# Altium PCB PCB.PcbDoc (part 2 of 3)
Units mm, origin at the board's own origin, x right, y up, seen from the top; angles counter-clockwise.
Board outline 60.66 x 261 mm, 2 copper layers (Top Layer, Bottom Layer); 258 components, 193 nets, 900 pads, 4 vias.
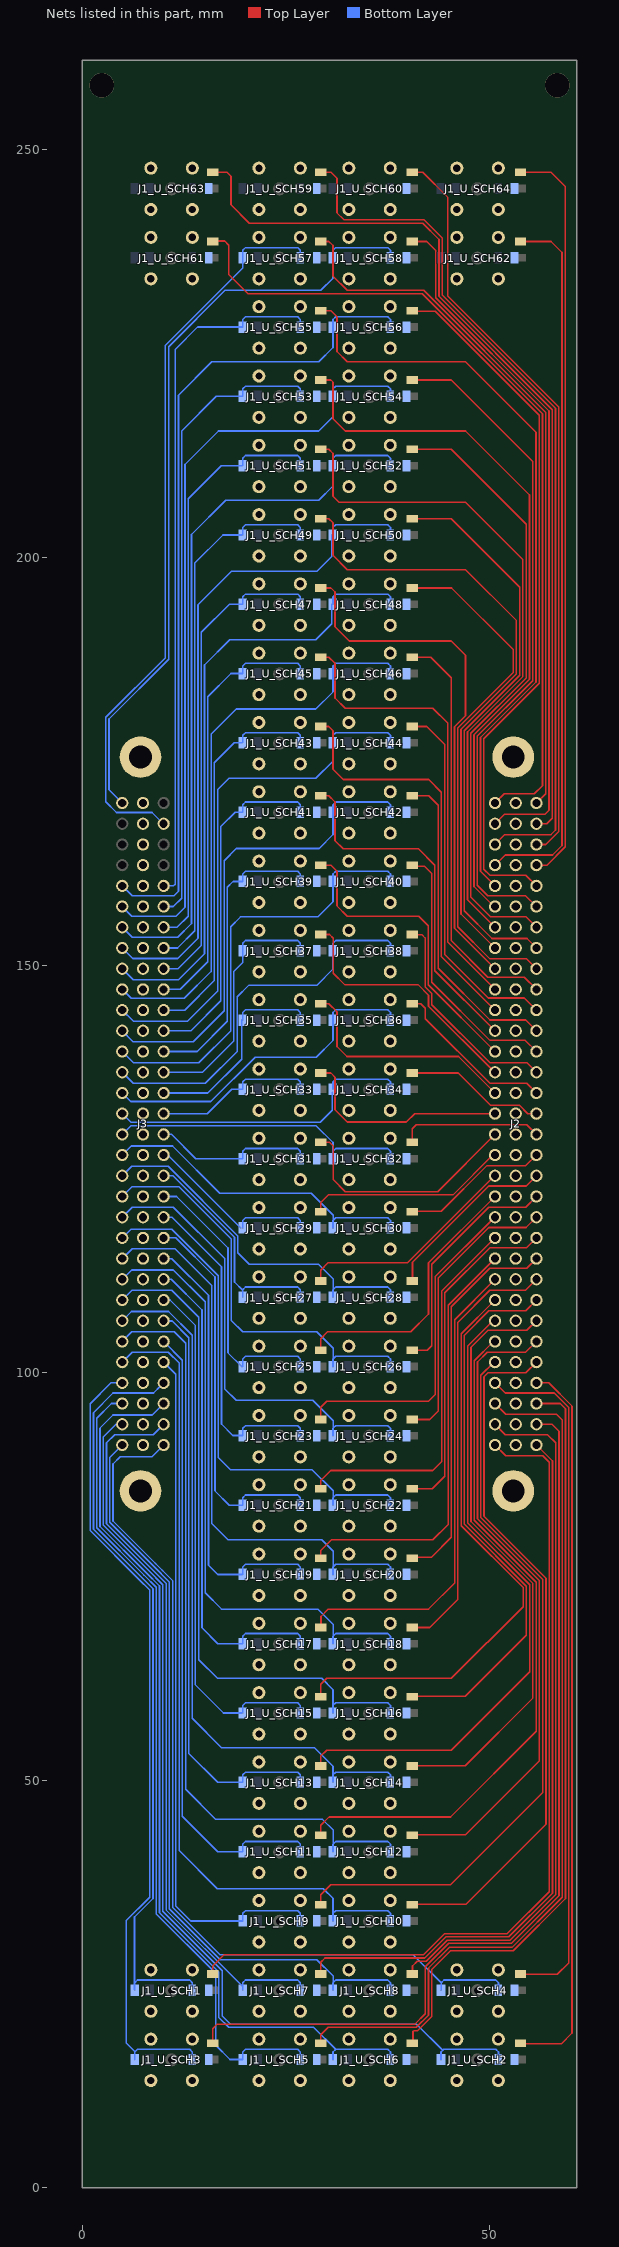
[diagram p2: the nets of this part, all layers, seen from the top]

## Part data
C1_U_SCH1 C1_U_SCH2 C1_U_SCH3 C1_U_SCH4 C1_U_SCH5 C1_U_SCH6 C1_U_SCH7 C1_U_SCH8 C1_U_SCH9 C1_U_SCH10 C1_U_SCH11 C1_U_SCH12 C1_U_SCH13 C1_U_SCH14 C1_U_SCH15 C1_U_SCH16 C1_U_SCH17 C1_U_SCH18 C1_U_SCH19 C1_U_SCH20 C1_U_SCH21 C1_U_SCH22 C1_U_SCH23 C1_U_SCH24 C1_U_SCH25 C1_U_SCH26 C1_U_SCH27 C1_U_SCH28 C1_U_SCH29 C1_U_SCH30 C1_U_SCH31 C1_U_SCH32 C1_U_SCH33 C1_U_SCH34 C1_U_SCH35 C1_U_SCH36 C1_U_SCH37 C1_U_SCH38 C1_U_SCH39 C1_U_SCH40 C1_U_SCH41 C1_U_SCH42 C1_U_SCH43 C1_U_SCH44 C1_U_SCH45 C1_U_SCH46 C1_U_SCH47 C1_U_SCH48 C1_U_SCH49 C1_U_SCH50 C1_U_SCH51 C1_U_SCH52 C1_U_SCH53 C1_U_SCH54 C1_U_SCH55 C1_U_SCH56 C1_U_SCH57 C1_U_SCH58 C1_U_SCH59 C1_U_SCH60 C1_U_SCH61 C1_U_SCH62 C1_U_SCH63 C1_U_SCH64: library part CC0805_10NF_50V_10%_X7R, "Non-polarised capacitor", Case=0805, Manufacturer=GENERIC, Manufacturer1 ComponentHeight=0.88mm, Manufacturer1 Example=KEMET, Manufacturer1 Part Number=C0805C103K5RACTU, Tolerance=±10%, Voltage=50V, Author="CERN DEM JLC", Component Type=Standard, CreateDate=03.12.2007, HelpURL=\\cern.ch\dfs\Applications\Altium\Datasheets\CC0805_X7R_KEMET.pdf, LatestRevisionDate=22.04.2015, Manufacturer Part Number=CC0805_10NF_50V_10%_X7R, Mounted=Yes, Part Description="SMD Multilayer Chip Ceramic Capacitor", Part Number=CC0805_10NF_50V_10%_X7R, Pin Count=2, Sense=No, SMD=Yes, Socket=No, Status=Preferred, TC=X7R
J1_U_SCH1 J1_U_SCH2 J1_U_SCH3 J1_U_SCH4 J1_U_SCH5 J1_U_SCH6 J1_U_SCH7 J1_U_SCH8 J1_U_SCH9 J1_U_SCH10 J1_U_SCH11 J1_U_SCH12 J1_U_SCH13 J1_U_SCH14 J1_U_SCH15 J1_U_SCH16 J1_U_SCH17 J1_U_SCH18 J1_U_SCH19 J1_U_SCH20 J1_U_SCH21 J1_U_SCH22 J1_U_SCH23 J1_U_SCH24 J1_U_SCH25 J1_U_SCH26 J1_U_SCH27 J1_U_SCH28 J1_U_SCH29 J1_U_SCH30 J1_U_SCH31 J1_U_SCH32 J1_U_SCH33 J1_U_SCH34 J1_U_SCH35 J1_U_SCH36 J1_U_SCH37 J1_U_SCH38 J1_U_SCH39 J1_U_SCH40 J1_U_SCH41 J1_U_SCH42 J1_U_SCH43 J1_U_SCH44 J1_U_SCH45 J1_U_SCH46 J1_U_SCH47 J1_U_SCH48 J1_U_SCH49 J1_U_SCH50 J1_U_SCH51 J1_U_SCH52 J1_U_SCH53 J1_U_SCH54 J1_U_SCH55 J1_U_SCH56 J1_U_SCH57 J1_U_SCH58 J1_U_SCH59 J1_U_SCH60 J1_U_SCH61 J1_U_SCH62 J1_U_SCH63 J1_U_SCH64: library part LEMO_EPA.00.250.NTN, Manufacturer=LEMO, Manufacturer Part Number=EPA.00.250.NTN, Author="CERN DEM JLC", ComponentHeight=14mm, Component Type=Standard, CreateDate=22.04.2008, Family="LEMO 00", HelpURL=\\cern.ch\dfs\Applications\Altium\Datasheets\LEMO_EPA.00.250.NTN.pdf, LatestRevisionDate=22.04.2008, Mounted=Yes, Part Description="Size 00, 50 Ohms Coaxial Straight socket", Part Number=LEMO_EPA.00.250.NTN, Pin Count=2, PressFit=No, SCEM=09.46.11.184.2, Sense=No, SMD=No, Socket=No, Status=None
J2 J3: library part "HARTING_09 03 296 6861", "Connector 96abc Female (3x32)", Manufacturer=HARTING, Manufacturer Part Number="09 03 296 6861", Author="CERN DEM JLC", ComponentHeight=11.6mm, Component Type=Standard, CreateDate=19.12.2016, Family="DIN 41612 Type C", HelpURL="\\cern.ch\dfs\Applications\Altium\Datasheets\HARTING_09 03 296 6861.pdf", LatestRevisionDate=19.12.2016, Mounted=Yes, Part Description="DIN 41612, Type C, 96 Position, Rows a+b+c, Performance level 2, Press-in Lead Lead 13mm, Pitch 2.54mm, Straight Female Connector", Part Number="HARTING_09 03 296 6861", Pin Count=98, PressFit=Yes, Sense=No, SMD=No, Socket=No, Status=None
R1_U_SCH1 R1_U_SCH2 R1_U_SCH3 R1_U_SCH4 R1_U_SCH5 R1_U_SCH6 R1_U_SCH7 R1_U_SCH8 R1_U_SCH9 R1_U_SCH10 R1_U_SCH11 R1_U_SCH12 R1_U_SCH13 R1_U_SCH14 R1_U_SCH15 R1_U_SCH16 R1_U_SCH17 R1_U_SCH18 R1_U_SCH19 R1_U_SCH20 R1_U_SCH21 R1_U_SCH22 R1_U_SCH23 R1_U_SCH24 R1_U_SCH25 R1_U_SCH26 R1_U_SCH27 R1_U_SCH28 R1_U_SCH29 R1_U_SCH30 R1_U_SCH31 R1_U_SCH32 R1_U_SCH33 R1_U_SCH34 R1_U_SCH35 R1_U_SCH36 R1_U_SCH37 R1_U_SCH38 R1_U_SCH39 R1_U_SCH40 R1_U_SCH41 R1_U_SCH42 R1_U_SCH43 R1_U_SCH44 R1_U_SCH45 R1_U_SCH46 R1_U_SCH47 R1_U_SCH48 R1_U_SCH49 R1_U_SCH50 R1_U_SCH51 R1_U_SCH52 R1_U_SCH53 R1_U_SCH54 R1_U_SCH55 R1_U_SCH56 R1_U_SCH57 R1_U_SCH58 R1_U_SCH59 R1_U_SCH60 R1_U_SCH61 R1_U_SCH62 R1_U_SCH63 R1_U_SCH64: library part R0805_300R_1%_0.125W_100PPM, "Resistor - 1%", Case=0805, Manufacturer=GENERIC, Manufacturer1 ComponentHeight=0.6mm, Manufacturer1 Example="NIC COMPONENT", Manufacturer1 Part Number=NRC10F3000TRF, Power=0.125W, Tolerance=±1%, Author="CERN DEM JLC", Component Type=Standard, CreateDate=03.12.2007, HelpURL=\\cern.ch\dfs\Applications\Altium\Datasheets\R0805_NIC_NRC.pdf, LatestRevisionDate=13.03.2008, Manufacturer Part Number=R0805_300R_1%_0.125W_100PPM, Mounted=Yes, Part Description="General Purpose Thick Film Chip Resistor", Part Number=R0805_300R_1%_0.125W_100PPM, Pin Count=2, PressFit=No, Sense=No, SMD=Yes, Socket=No, Status=Preferred, TC=±100ppm/°C
R2_U_SCH1 R2_U_SCH2 R2_U_SCH3 R2_U_SCH4 R2_U_SCH5 R2_U_SCH6 R2_U_SCH7 R2_U_SCH8 R2_U_SCH9 R2_U_SCH10 R2_U_SCH11 R2_U_SCH12 R2_U_SCH13 R2_U_SCH14 R2_U_SCH15 R2_U_SCH16 R2_U_SCH17 R2_U_SCH18 R2_U_SCH19 R2_U_SCH20 R2_U_SCH21 R2_U_SCH22 R2_U_SCH23 R2_U_SCH24 R2_U_SCH25 R2_U_SCH26 R2_U_SCH27 R2_U_SCH28 R2_U_SCH29 R2_U_SCH30 R2_U_SCH31 R2_U_SCH32 R2_U_SCH33 R2_U_SCH34 R2_U_SCH35 R2_U_SCH36 R2_U_SCH37 R2_U_SCH38 R2_U_SCH39 R2_U_SCH40 R2_U_SCH41 R2_U_SCH42 R2_U_SCH43 R2_U_SCH44 R2_U_SCH45 R2_U_SCH46 R2_U_SCH47 R2_U_SCH48 R2_U_SCH49 R2_U_SCH50 R2_U_SCH51 R2_U_SCH52 R2_U_SCH53 R2_U_SCH54 R2_U_SCH55 R2_U_SCH56 R2_U_SCH57 R2_U_SCH58 R2_U_SCH59 R2_U_SCH60 R2_U_SCH61 R2_U_SCH62 R2_U_SCH63 R2_U_SCH64: library part R0805_51R_1%_0.125W_100PPM, "Resistor - 1%", Case=0805, Manufacturer=GENERIC, Manufacturer1 ComponentHeight=0.6mm, Manufacturer1 Example="NIC COMPONENT", Manufacturer1 Part Number=NRC10F51R0TRF, Power=0.125W, Tolerance=±1%, Author="CERN DEM JLC", Component Type=Standard, CreateDate=03.12.2007, HelpURL=\\cern.ch\dfs\Applications\Altium\Datasheets\R0805_NIC_NRC.pdf, LatestRevisionDate=13.03.2008, Manufacturer Part Number=R0805_51R_1%_0.125W_100PPM, Mounted=Yes, Part Description="General Purpose Thick Film Chip Resistor", Part Number=R0805_51R_1%_0.125W_100PPM, Pin Count=2, PressFit=No, Sense=No, SMD=Yes, Socket=No, Status=Preferred, TC=±100ppm/°C

## Via types
v1: diameter 3, hole 3, Top Layer to Bottom Layer, 4 vias

## Nets (pads, with @x,y where several pads share a name; then routed paths per layer and width w, separated by ;. In a path a pad name is that pad's centre, name@x,y a point inside that pad or via, vN(x,y) a via of type N, cw(c..) or ccw(c..) an arc to the next point about the centre after c; other vN are vias at no path point)
GND: J1_U_SCH1.2 J1_U_SCH2.2 J1_U_SCH3.2 J1_U_SCH4.2 J1_U_SCH5.2 J1_U_SCH6.2 J1_U_SCH7.2 J1_U_SCH8.2 J1_U_SCH9.2 J1_U_SCH10.2 J1_U_SCH11.2 J1_U_SCH12.2 J1_U_SCH13.2 J1_U_SCH14.2 J1_U_SCH15.2 J1_U_SCH16.2 J1_U_SCH17.2 J1_U_SCH18.2 J1_U_SCH19.2 J1_U_SCH20.2 J1_U_SCH21.2 J1_U_SCH22.2 J1_U_SCH23.2 J1_U_SCH24.2 J1_U_SCH25.2 J1_U_SCH26.2 J1_U_SCH27.2 J1_U_SCH28.2 J1_U_SCH29.2 J1_U_SCH30.2 J1_U_SCH31.2 J1_U_SCH32.2 J1_U_SCH33.2 J1_U_SCH34.2 J1_U_SCH35.2 J1_U_SCH36.2 J1_U_SCH37.2 J1_U_SCH38.2 J1_U_SCH39.2 J1_U_SCH40.2 J1_U_SCH41.2 J1_U_SCH42.2 J1_U_SCH43.2 J1_U_SCH44.2 J1_U_SCH45.2 J1_U_SCH46.2 J1_U_SCH47.2 J1_U_SCH48.2 J1_U_SCH49.2 J1_U_SCH50.2 J1_U_SCH51.2 J1_U_SCH52.2 J1_U_SCH53.2 J1_U_SCH54.2 J1_U_SCH55.2 J1_U_SCH56.2 J1_U_SCH57.2 J1_U_SCH58.2 J1_U_SCH59.2 J1_U_SCH60.2 J1_U_SCH61.2 J1_U_SCH62.2 J1_U_SCH63.2 J1_U_SCH64.2 J2.b1 J2.b2 J2.b3 J2.b4 J2.b5 J2.b6 J2.b7 J2.b8 J2.b9 J2.b10 J2.b11 J2.b12 J2.b13 J2.b14 J2.b15 J2.b16 J2.b17 J2.b18 J2.b19 J2.b20 J2.b21 J2.b22 J2.b23 J2.b24 J2.b25 J2.b26 J2.b27 J2.b28 J2.b29 J2.b30 J2.b31 J2.b32 J2.MTG1 J2.MTG2 J3.b1 J3.b2 J3.b3 J3.b4 J3.b5 J3.b6 J3.b7 J3.b8 J3.b9 J3.b10 J3.b11 J3.b12 J3.b13 J3.b14 J3.b15 J3.b16 J3.b17 J3.b18 J3.b19 J3.b20 J3.b21 J3.b22 J3.b23 J3.b24 J3.b25 J3.b26 J3.b27 J3.b28 J3.b29 J3.b30 J3.b31 J3.b32 J3.MTG1 J3.MTG2 R2_U_SCH1.1 R2_U_SCH2.1 R2_U_SCH3.1 R2_U_SCH4.1 R2_U_SCH5.1 R2_U_SCH6.1 R2_U_SCH7.1 R2_U_SCH8.1 R2_U_SCH9.1 R2_U_SCH10.1 R2_U_SCH11.1 R2_U_SCH12.1 R2_U_SCH13.1 R2_U_SCH14.1 R2_U_SCH15.1 R2_U_SCH16.1 R2_U_SCH17.1 R2_U_SCH18.1 R2_U_SCH19.1 R2_U_SCH20.1 R2_U_SCH21.1 R2_U_SCH22.1 R2_U_SCH23.1 R2_U_SCH24.1 R2_U_SCH25.1 R2_U_SCH26.1 R2_U_SCH27.1 R2_U_SCH28.1 R2_U_SCH29.1 R2_U_SCH30.1 R2_U_SCH31.1 R2_U_SCH32.1 R2_U_SCH33.1 R2_U_SCH34.1 R2_U_SCH35.1 R2_U_SCH36.1 R2_U_SCH37.1 R2_U_SCH38.1 R2_U_SCH39.1 R2_U_SCH40.1 R2_U_SCH41.1 R2_U_SCH42.1 R2_U_SCH43.1 R2_U_SCH44.1 R2_U_SCH45.1 R2_U_SCH46.1 R2_U_SCH47.1 R2_U_SCH48.1 R2_U_SCH49.1 R2_U_SCH50.1 R2_U_SCH51.1 R2_U_SCH52.1 R2_U_SCH53.1 R2_U_SCH54.1 R2_U_SCH55.1 R2_U_SCH56.1 R2_U_SCH57.1 R2_U_SCH58.1 R2_U_SCH59.1 R2_U_SCH60.1 R2_U_SCH61.1 R2_U_SCH62.1 R2_U_SCH63.1 R2_U_SCH64.1
  other v1: 2.39,257.9 58.27,257.9
HV_OFFSET1: J2.a1 R1_U_SCH1.2 | length 106.1
  Top Layer w0.2: R1_U_SCH1.2@16.025,26.35 16.025,27.225 17.4,28.6 41.872,28.6 44.47,31.199 52.17,31.199 57.3,36.328 57.3,88.994 56.494,89.8 51.98,89.8 J2.a1@50.65,91.13
HV_OFFSET2: J2.c4 R1_U_SCH2.2 | length 89.3
  Top Layer w0.2: R1_U_SCH2.2@53.775,17.7 58.8,17.7 60.1,19 60.1,95.9 57.25,98.75 J2.c4@55.73,98.75
HV_OFFSET3: J2.c2 R1_U_SCH3.2 | length 114.5
  Top Layer w0.2: R1_U_SCH3.2@16.025,17.75 16.025,19.525 16.6,20.1 40.834,20.1 42.1,21.366 42.1,27.131 44.967,29.999 52.667,29.999 58.5,35.831 58.5,92.8 57.63,93.67 J2.c2@55.73,93.67
HV_OFFSET4: J2.a4 R1_U_SCH4.2 | length 84.9
  Top Layer w0.2: J2.a4@50.65,98.75 51.9,97.5 57.934,97.5 59.7,95.734 59.7,27.6 58.3,26.2 R1_U_SCH4.2@53.825,26.2
HV_OFFSET5: J2.a3 R1_U_SCH5.2 | length 108.6
  Top Layer w0.2: R1_U_SCH5.2@29.275,17.75 29.275,18.775 30.2,19.7 41,19.7 42.5,21.2 42.5,26.966 45.034,29.5 52.734,29.5 58.9,35.666 58.9,94.2 58.2,94.9 51.96,94.9 J2.a3@50.65,96.21
HV_OFFSET6: J2.c3 R1_U_SCH6.2 | length 94.2
  Top Layer w0.2: R1_U_SCH6.2@40.525,17.75 40.6,17.825 40.6,19.183 40.717,19.3 41.166,19.3 42.9,21.034 42.9,26.8 45.2,29.1 52.9,29.1 59.3,35.5 59.3,95.569 58.659,96.21 J2.c3@55.73,96.21
HV_OFFSET7: J2.c1 R1_U_SCH7.2 | length 89
  Top Layer w0.2: R1_U_SCH7.2@29.275,26.35 29.275,27.675 29.8,28.2 42.037,28.2 44.636,30.799 52.336,30.799 57.7,36.163 57.7,89.16 J2.c1@55.73,91.13
HV_OFFSET8: J2.a2 R1_U_SCH8.2 | length 86
  Top Layer w0.2: R1_U_SCH8.2@40.525,26.25 40.525,27.225 41.1,27.8 42.203,27.8 44.801,30.399 52.501,30.399 58.1,35.997 58.1,91.4 57.1,92.4 51.92,92.4 J2.a2@50.65,93.67
HV_OFFSET9: J2.a5 R1_U_SCH9.2 | length 90.3
  Top Layer w0.2: R1_U_SCH9.2@29.275,34.85 29.275,35.975 30.5,37.2 45.2,37.2 56.5,48.5 56.5,63.8 56.5,74.634 48.9,82.234 48.9,99.666 50.524,101.29 J2.a5@50.65,101.29
HV_OFFSET10: J2.c5 R1_U_SCH10.2 | length 85.7
  Top Layer w0.2: R1_U_SCH10.2@40.525,34.8 47.1,34.8 56.9,44.6 56.9,74.8 49.3,82.4 49.3,99.5 49.8,100 54.44,100 J2.c5@55.73,101.29
HV_OFFSET11: J2.a6 R1_U_SCH11.2 | length 84.5
  Top Layer w0.2: R1_U_SCH11.2@29.275,43.35 29.275,44.475 30.3,45.5 45.2,45.5 55.7,56 55.7,67.116 55.7,74.303 48.1,81.903 48.1,101.466 50.464,103.83 J2.a6@50.65,103.83
HV_OFFSET12: J2.c6 R1_U_SCH12.2 | length 79.7
  Top Layer w0.2: R1_U_SCH12.2@40.525,43.3 47,43.3 56.1,52.4 56.1,66.95 56.1,74.469 48.5,82.069 48.5,101.3 49.7,102.5 54.4,102.5 J2.c6@55.73,103.83
HV_OFFSET13: J2.a7 R1_U_SCH13.2 | length 78.9
  Top Layer w0.2: R1_U_SCH13.2@29.275,51.75 29.275,52.975 30,53.7 45.3,53.7 54.9,63.3 54.9,69.5 54.9,73.972 47.3,81.572 47.3,103.266 50.404,106.37 J2.a7@50.65,106.37
HV_OFFSET14: J2.c7 R1_U_SCH14.2 | length 73.7
  Top Layer w0.2: R1_U_SCH14.2@40.525,51.8 47,51.8 55.3,60.1 55.3,67.6 ; 55.3,67.6 55.3,74.137 47.7,81.737 47.7,103.1 49.8,105.2 54.56,105.2 J2.c7@55.73,106.37
HV_OFFSET15: J2.a8 R1_U_SCH15.2 | length 72.8
  Top Layer w0.2: R1_U_SCH15.2@29.275,60.25 29.275,61.775 30,62.5 45.3,62.5 54.1,71.3 54.1,73.64 46.5,81.24 46.5,104.766 50.644,108.91 J2.a8@50.65,108.91
HV_OFFSET16: J2.c8 R1_U_SCH16.2 | length 67.6
  Top Layer w0.2: R1_U_SCH16.2@40.525,60.3 47,60.3 54.5,67.8 54.5,69.75 54.5,73.806 46.9,81.406 46.9,104.6 49.9,107.6 54.42,107.6 J2.c8@55.73,108.91
HV_OFFSET17: J2.a9 R1_U_SCH17.2 | length 58.8
  Top Layer w0.2: R1_U_SCH17.2@29.275,68.75 29.3,68.775 29.3,70.1 30.2,71 42.5,71 45.7,74.2 45.7,106.5 J2.a9@50.65,111.45
HV_OFFSET18: J2.c9 R1_U_SCH18.2 | length 52.8
  Top Layer w0.2: R1_U_SCH18.2@40.525,68.75 42.65,68.75 46.1,72.2 46.1,106.2 50,110.1 54.38,110.1 J2.c9@55.73,111.45
HV_OFFSET19: J2.a10 R1_U_SCH19.2 | length 52.8
  Top Layer w0.2: R1_U_SCH19.2@29.275,77.35 29.275,78.175 30.6,79.5 43.025,79.5 44.9,81.375 44.9,108.266 50.624,113.99 J2.a10@50.65,113.99
HV_OFFSET20: J2.c10 R1_U_SCH20.2 | length 47
  Top Layer w0.2: R1_U_SCH20.2@40.525,77.35 42.85,77.35 45.3,79.8 45.3,108.1 50,112.8 54.54,112.8 J2.c10@55.73,113.99
HV_OFFSET21: J2.a11 R1_U_SCH21.2 | length 46.9
  Top Layer w0.2: R1_U_SCH21.2@29.275,85.85 29.275,86.775 30.5,88 43.025,88 44.1,89.075 44.1,109.98 J2.a11@50.65,116.53
HV_OFFSET22: J2.c11 R1_U_SCH22.2 | length 41.1
  Top Layer w0.2: R1_U_SCH22.2@40.525,85.75 42.95,85.75 44.5,87.3 44.5,109.8 50,115.3 54.5,115.3 J2.c11@55.73,116.53
HV_OFFSET23: J2.a12 R1_U_SCH23.2 | length 40.9
  Top Layer w0.2: R1_U_SCH23.2@29.275,94.35 29.275,95.775 30,96.5 42.5,96.5 43.3,97.3 43.3,111.766 50.604,119.07 J2.a12@50.65,119.07
HV_OFFSET24: J2.c12 R1_U_SCH24.2 | length 35
  Top Layer w0.2: R1_U_SCH24.2@40.525,94.25 42.65,94.25 43.7,95.3 43.7,111.6 49.9,117.8 54.46,117.8 J2.c12@55.73,119.07
HV_OFFSET25: J2.a13 R1_U_SCH25.2 | length 33.6
  Top Layer w0.2: R1_U_SCH25.2@29.275,102.85 29.275,104.175 30.1,105 40.3,105 42.5,107.2 42.5,113.466 50.644,121.61 J2.a13@50.65,121.61
HV_OFFSET26: J2.c13 R1_U_SCH26.2 | length 28.9
  Top Layer w0.2: R1_U_SCH26.2@40.525,102.75 42.35,102.75 42.9,103.3 42.9,113.3 49.9,120.3 54.42,120.3 J2.c13@55.73,121.61
HV_OFFSET27: J2.a14 R1_U_SCH27.2 | length 27.4
  Top Layer w0.2: R1_U_SCH27.2@29.275,111.35 29.275,112.575 30.2,113.5 39.934,113.5 50.584,124.15 J2.a14@50.65,124.15
HV_OFFSET28: J2.c14 R1_U_SCH28.2 | length 21.9
  Top Layer w0.2: R1_U_SCH28.2@40.525,111.25 40.525,113.525 49.9,122.9 54.48,122.9 J2.c14@55.73,124.15
HV_OFFSET29: J2.a15 R1_U_SCH29.2 | length 24.8
  Top Layer w0.2: R1_U_SCH29.2@29.275,119.85 29.275,120.875 30.2,121.8 45.5,121.8 50.39,126.69 J2.a15@50.65,126.69
HV_OFFSET30: J2.c15 R1_U_SCH30.2 | length 18
  Top Layer w0.2: R1_U_SCH30.2@40.575,119.8 44.066,119.8 49.666,125.4 54.44,125.4 J2.c15@55.73,126.69
HV_OFFSET31: J2.a16 R1_U_SCH31.2 | length 29.2
  Top Layer w0.2: R1_U_SCH31.2@29.275,128.25 30.35,128.25 30.8,127.8 30.8,123.7 32.3,122.2 43.62,122.2 J2.a16@50.65,129.23
HV_OFFSET32: J2.c16 R1_U_SCH32.2 | length 17.6
  Top Layer w0.2: R1_U_SCH32.2@40.525,128.25 40.5,128.275 40.5,129.9 41,130.4 54.56,130.4 J2.c16@55.73,129.23
HV_OFFSET33: J2.a17 R1_U_SCH33.2 | length 26.6
  Top Layer w0.2: R1_U_SCH33.2@29.275,136.75 30.525,136.75 31.025,136.25 31.025,132.25 32.525,130.75 39.775,130.75 40.795,131.77 J2.a17@50.65,131.77
HV_OFFSET34: J2.c17 R1_U_SCH34.2 | length 17.3
  Top Layer w0.2: R1_U_SCH34.2@40.525,136.75 46.15,136.75 50.08,132.82 53.625,132.82 54.675,131.77 J2.c17@55.73,131.77
HV_OFFSET35: J2.a18 R1_U_SCH35.2 | length 28.4
  Top Layer w0.2: R1_U_SCH35.2@29.275,145.25 30.275,145.25 31.275,144.25 31.275,140 32.495,138.78 46.18,138.78 J2.a18@50.65,134.31
HV_OFFSET36: J2.c18 R1_U_SCH36.2 | length 20.5
  Top Layer w0.2: R1_U_SCH36.2@40.525,145.25 41.55,145.25 42.1,144.7 42.1,143.426 50.026,135.5 54.54,135.5 J2.c18@55.73,134.31
HV_OFFSET37: J2.a19 R1_U_SCH37.2 | length 31.7
  Top Layer w0.2: R1_U_SCH37.2@29.275,153.75 30.35,153.75 30.8,153.3 30.8,149 32.2,147.6 41.2,147.6 42.5,146.3 42.5,144.959 50.609,136.85 J2.a19@50.65,136.85
HV_OFFSET38: J2.c19 R1_U_SCH38.2 | length 26.5
  Top Layer w0.2: R1_U_SCH38.2@40.525,153.75 40.575,153.7 41.7,153.7 42.075,153.325 42.075,147.325 42.9,146.5 42.9,145.125 50.025,138 54.58,138 J2.c19@55.73,136.85
HV_OFFSET39: J2.a20 R1_U_SCH39.2 | length 37.6
  Top Layer w0.2: R1_U_SCH39.2@29.275,162.25 30.525,162.25 31.275,161.5 31.275,157.25 32.525,156 41.3,156 42.475,154.825 42.475,147.565 J2.a20@50.65,139.39
HV_OFFSET40: J2.c20 R1_U_SCH40.2 | length 32.5
  Top Layer w0.2: R1_U_SCH40.2@40.525,162.25 40.675,162.1 42,162.1 42.875,161.225 42.875,147.9 50.025,140.75 54.37,140.75 J2.c20@55.73,139.39
HV_OFFSET41: J2.a21 R1_U_SCH41.2 | length 43.7
  Top Layer w0.2: R1_U_SCH41.2@29.275,170.75 30.275,170.75 31.025,170 31.025,165.25 32.025,164.25 41.275,164.25 43.275,162.25 43.275,149.305 J2.a21@50.65,141.93
HV_OFFSET42: J2.c21 R1_U_SCH42.2 | length 38.9
  Top Layer w0.2: R1_U_SCH42.2@40.525,170.75 42.525,170.75 43.675,169.6 43.675,149.6 50.025,143.25 54.41,143.25 J2.c21@55.73,141.93
HV_OFFSET43: J2.a22 R1_U_SCH43.2 | length 50.4
  Top Layer w0.2: R1_U_SCH43.2@29.275,179.25 30.275,179.25 30.775,178.75 30.775,174 32.025,172.75 42.525,172.75 44.075,171.2 44.075,151.045 J2.a22@50.65,144.47
HV_OFFSET44: J2.c22 R1_U_SCH44.2 | length 44.7
  Top Layer w0.2: R1_U_SCH44.2@40.525,179.25 42.275,179.25 44.475,177.05 44.475,151.3 49.815,145.96 54.24,145.96 J2.c22@55.73,144.47
HV_OFFSET45: J2.a23 R1_U_SCH45.2 | length 56.5
  Top Layer w0.2: R1_U_SCH45.2@29.275,187.75 30.275,187.75 31.025,187 31.025,182.75 32.275,181.5 43.025,181.5 44.875,179.65 44.875,152.785 J2.a23@50.65,147.01
HV_OFFSET46: J2.c23 R1_U_SCH46.2 | length 51
  Top Layer w0.2: R1_U_SCH46.2@40.525,187.75 42.775,187.75 45.275,185.25 45.275,153 49.775,148.5 54.24,148.5 J2.c23@55.73,147.01
HV_OFFSET47: J2.a24 R1_U_SCH47.2 | length 64.7
  Top Layer w0.2: R1_U_SCH47.2@29.275,196.25 30.525,196.25 31.025,195.75 31.025,191.5 32.775,189.75 45.275,189.75 47.025,188 47.025,180.591 45.675,179.241 45.675,154.525 J2.a24@50.65,149.55
HV_OFFSET48: J2.c24 R1_U_SCH48.2 | length 64.1
  Top Layer w0.2: R1_U_SCH48.2@40.525,196.25 45.325,196.25 52.875,188.7 52.875,185.875 46.075,179.075 46.075,154.7 50.025,150.75 54.53,150.75 J2.c24@55.73,149.55
HV_OFFSET49: J2.a25 R1_U_SCH49.2 | length 76.2
  Top Layer w0.2: R1_U_SCH49.2@29.275,204.75 30.275,204.75 30.775,204.25 30.775,200.25 32.525,198.5 47.025,198.5 53.275,192.25 53.275,185.71 46.475,178.91 46.475,156.265 J2.a25@50.65,152.09
HV_OFFSET50: J2.c25 R1_U_SCH50.2 | length 69.9
  Top Layer w0.2: R1_U_SCH50.2@40.525,204.75 45.275,204.75 53.675,196.35 53.675,185.544 46.875,178.744 46.875,156.65 50.275,153.25 54.57,153.25 J2.c25@55.73,152.09
HV_OFFSET51: J2.a26 R1_U_SCH51.2 | length 82.8
  Top Layer w0.2: R1_U_SCH51.2@29.275,213.25 30.275,213.25 30.775,212.75 30.775,207.5 31.525,206.75 47.025,206.75 54.075,199.7 54.075,185.378 47.275,178.578 47.275,158.005 J2.a26@50.65,154.63
HV_OFFSET52: J2.c26 R1_U_SCH52.2 | length 75.9
  Top Layer w0.2: R1_U_SCH52.2@40.525,213.25 45.275,213.25 54.475,204.05 54.475,185.213 47.675,178.413 47.675,158.35 50.086,155.939 54.421,155.939 J2.c26@55.73,154.63
HV_OFFSET53: J2.a27 R1_U_SCH53.2 | length 88.5
  Top Layer w0.2: R1_U_SCH53.2@29.275,221.75 30.525,221.75 30.775,221.5 30.775,217 32.275,215.5 47.025,215.5 54.875,207.65 54.875,185.047 48.075,178.247 48.075,159.634 50.539,157.17 J2.a27@50.65,157.17
HV_OFFSET54: J2.c27 R1_U_SCH54.2 | length 82
  Top Layer w0.2: R1_U_SCH54.2@40.525,221.75 45.275,221.75 55.275,211.75 55.275,184.881 48.475,178.081 48.475,159.8 49.775,158.5 54.4,158.5 J2.c27@55.73,157.17
HV_OFFSET55: J2.a28 R1_U_SCH55.2 | length 94.3
  Top Layer w0.2: R1_U_SCH55.2@29.275,230.25 30.525,230.25 31.275,229.5 31.275,225.25 32.525,224 47.025,224 55.675,215.35 55.675,184.716 48.875,177.916 48.875,161.485 J2.a28@50.65,159.71
HV_OFFSET56: J2.c28 R1_U_SCH56.2 | length 86.6
  Top Layer w0.2: R1_U_SCH56.2@40.525,230.2 43.325,230.2 56.075,217.45 56.075,184.55 49.275,177.75 49.275,161.75 50.025,161 54.44,161 J2.c28@55.73,159.71
HV_OFFSET57: J2.c32 R1_U_SCH57.2 | length 86.9
  Top Layer w0.2: R1_U_SCH57.2@29.275,238.75 30.275,238.75 30.775,238.25 30.775,234.5 32.525,232.75 41.906,232.75 56.875,217.781 56.875,171.015 J2.c32@55.73,169.87
HV_OFFSET58: J2.a31 R1_U_SCH58.2 | length 85
  Top Layer w0.2: R1_U_SCH58.2@40.525,238.75 42.275,238.75 43.375,237.65 43.375,231.847 57.275,217.947 57.275,169 56.775,168.5 51.82,168.5 J2.a31@50.65,167.33
HV_OFFSET59: J2.a30 R1_U_SCH59.2 | length 107.3
  Top Layer w0.2: R1_U_SCH59.2@29.275,247.25 30.525,247.25 31.275,246.5 31.275,242.25 32.125,241.4 41.941,241.4 44.175,239.166 44.175,232.178 58.075,218.278 58.075,166.55 57.525,166 51.86,166 J2.a30@50.65,164.79
HV_OFFSET60: J2.c30 R1_U_SCH60.2 | length 92.4
  Top Layer w0.2: R1_U_SCH60.2@40.525,247.25 41.775,247.25 44.875,244.15 44.875,232.044 58.475,218.444 58.475,166.384 56.881,164.79 J2.c30@55.73,164.79
HV_OFFSET61: J2.a32 R1_U_SCH61.2 | length 103.6
  Top Layer w0.2: R1_U_SCH61.2@16.075,238.8 17.5,238.8 18,238.3 18,234.7 20.35,232.35 41.741,232.35 56.475,217.616 56.475,172 55.475,171 51.78,171 J2.a32@50.65,169.87
HV_OFFSET62: J2.a29 R1_U_SCH62.2 | length 87.6
  Top Layer w0.2: J2.a29@50.65,162.25 51.9,163.5 57.709,163.5 58.875,164.666 58.875,237.4 57.525,238.75 R1_U_SCH62.2@53.775,238.75
HV_OFFSET63: J2.c31 R1_U_SCH63.2 | length 112.2
  Top Layer w0.2: R1_U_SCH63.2@16.025,247.25 17.775,247.25 18.275,246.75 18.275,243.25 20.525,241 41.775,241 43.775,239 43.775,232.013 57.675,218.113 57.675,168 57.005,167.33 J2.c31@55.73,167.33
HV_OFFSET64: J2.c29 R1_U_SCH64.2 | length 91.7
  Top Layer w0.2: R1_U_SCH64.2@53.775,247.25 57.525,247.25 59.275,245.5 59.275,164.5 57.025,162.25 J2.c29@55.73,162.25
INPUT_T1: C1_U_SCH1.2 J3.c4 R2_U_SCH1.2 | length 93.4
  Bottom Layer w0.2: C1_U_SCH1.2@6.425,24.3 6.425,33.225 8.7,35.5 8.7,73.5 7.3,74.9 1.4,80.8 1.4,95.1 3.8,97.5 8.76,97.5 J3.c4@9.58,98.32 ; C1_U_SCH1.2@6.475,24.25 6.475,25.175 6.8,25.5 13.2,25.5 13.525,25.175 R2_U_SCH1.2@13.525,24.25
INPUT_T2: C1_U_SCH2.2 J3.a2 R2_U_SCH2.2 | length 118
  Bottom Layer w0.2: J3.a2@4.93,93.67 4.17,93.67 2.6,92.1 2.6,81.303 8.151,75.751 9.904,73.999 9.904,33.927 17.183,26.649 17.183,21.083 18.166,20.1 41,20.1 44.225,16.875 ; C1_U_SCH2.2@44.025,15.75 44.025,16.675 44.225,16.875 ; R2_U_SCH2.2@51.075,15.75 51.075,16.675 50.75,17 44.35,17 44.225,16.875
INPUT_T3: C1_U_SCH3.2 J3.a4 R2_U_SCH3.2 | length 98.3
  Bottom Layer w0.2: J3.a4@4.93,98.75 3.55,98.75 1,96.2 1,80.634 7.017,74.617 8.3,73.334 8.3,35.666 5.4,32.766 5.4,17.8 6.5,16.7 ; C1_U_SCH3.2@6.475,15.75 6.475,16.675 6.5,16.7 ; R2_U_SCH3.2@13.525,15.75 13.525,16.675 13.2,17 6.8,17 6.5,16.7
INPUT_T4: C1_U_SCH4.2 J3.c1 R2_U_SCH4.2 | length 110.5
  Bottom Layer w0.2: J3.c1@10.01,91.13 8.58,89.7 4.7,89.7 3.8,88.8 3.8,81.8 9,76.6 9.87,75.73 11.104,74.496 11.104,34.424 16.928,28.6 40.6,28.6 44.05,25.15 ; C1_U_SCH4.2@44.025,24.25 44.05,24.275 44.05,25.15 ; R2_U_SCH4.2@51.075,24.25 51.075,25.175 50.75,25.5 44.4,25.5 44.05,25.15
INPUT_T5: C1_U_SCH5.2 J3.a3 R2_U_SCH5.2 | length 100
  Bottom Layer w0.2: J3.a3@4.93,96.21 3.61,96.21 1.8,94.4 1.8,80.972 7.586,75.186 9.104,73.667 9.104,33.596 16.383,26.317 16.383,17.517 18.15,15.75 C1_U_SCH5.2@19.725,15.75 19.725,16.675 20.05,17 26.45,17 26.775,16.675 R2_U_SCH5.2@26.775,15.75
INPUT_T6: C1_U_SCH6.2 J3.c3 R2_U_SCH6.2 | length 112.5
  Bottom Layer w0.2: J3.c3@10.01,96.21 8.6,94.8 3.8,94.8 2.2,93.2 2.2,81.137 7.869,75.469 9.504,73.833 9.504,33.762 16.783,26.483 16.783,20.917 18,19.7 28.4,19.7 31.1,17 ; C1_U_SCH6.2@30.775,15.75 30.775,16.675 31.1,17 ; R2_U_SCH6.2@37.825,15.75 37.825,16.675 37.5,17 31.1,17
INPUT_T7: C1_U_SCH7.2 J3.c2 R2_U_SCH7.2 | length 90.7
  Bottom Layer w0.2: J3.c2@10.01,93.67 8.74,92.4 4,92.4 3,91.4 3,81.469 8.434,76.034 10.304,74.164 10.304,34.093 C1_U_SCH7.2@19.699,24.699 ; C1_U_SCH7.2@19.725,24.25 19.725,25.175 20.05,25.5 26.45,25.5 26.775,25.175 R2_U_SCH7.2@26.775,24.25
INPUT_T8: C1_U_SCH8.2 J3.a1 R2_U_SCH8.2 | length 94
  Bottom Layer w0.2: J3.a1@4.93,91.13 3.4,89.6 3.4,81.634 8.717,76.317 10.704,74.33 10.704,34.259 16.963,28 28.8,28 30.8,26 30.8,25.2 ; C1_U_SCH8.2@30.775,24.25 30.775,25.175 30.8,25.2 ; R2_U_SCH8.2@37.825,24.25 37.825,25.175 37.5,25.5 31.1,25.5 30.8,25.2
INPUT_T9: C1_U_SCH9.2 J3.c5 R2_U_SCH9.2 | length 85.5
  Bottom Layer w0.2: J3.c5@10.01,101.29 11.504,99.796 11.504,34.59 13.344,32.75 C1_U_SCH9.2@19.725,32.75 19.725,33.675 20.05,34 26.45,34 26.775,33.675 R2_U_SCH9.2@26.775,32.75
INPUT_T10: C1_U_SCH10.2 J3.a5 R2_U_SCH10.2 | length 100.2
  Bottom Layer w0.2: J3.a5@4.93,101.29 6.157,102.517 10.583,102.517 11.904,101.196 11.904,41.396 16.6,36.7 29.6,36.7 30.775,35.525 30.775,33.675 ; C1_U_SCH10.2@30.775,32.75 30.775,33.6 30.775,33.675 ; R2_U_SCH10.2@37.825,32.75 37.825,33.675 37.5,34 31.1,34 30.775,33.675
INPUT_T11: C1_U_SCH11.2 J3.c6 R2_U_SCH11.2 | length 77.6
  Bottom Layer w0.2: J3.c6@10.01,103.83 12.304,101.536 12.304,45.596 16.65,41.25 C1_U_SCH11.2@19.725,41.25 19.725,42.175 20.05,42.5 26.45,42.5 26.775,42.175 R2_U_SCH11.2@26.775,41.25
INPUT_T12: C1_U_SCH12.2 J3.a6 R2_U_SCH12.2 | length 94.6
  Bottom Layer w0.2: J3.a6@4.93,103.83 6.1,105 11.3,105 12.704,103.596 12.704,48.896 16.4,45.2 29.5,45.2 30.8,43.9 30.8,42.2 ; C1_U_SCH12.2@30.775,41.25 30.775,42.175 30.8,42.2 ; R2_U_SCH12.2@37.825,41.25 37.825,42.175 37.5,42.5 31.1,42.5 30.8,42.2
INPUT_T13: C1_U_SCH13.2 J3.c7 R2_U_SCH13.2 | length 72.2
  Bottom Layer w0.2: J3.c7@10.01,106.37 10.04,106.34 11.06,106.34 13.104,104.296 13.104,53.296 16.65,49.75 C1_U_SCH13.2@19.725,49.75 19.725,50.675 20.05,51 26.45,51 26.775,50.675 R2_U_SCH13.2@26.775,49.75
INPUT_T14: C1_U_SCH14.2 J3.a7 R2_U_SCH14.2 | length 87.2
  Bottom Layer w0.2: J3.a7@4.93,106.37 6.06,107.5 10.6,107.5 13.504,104.596 13.504,57.6 17.104,54 28.5,54 30.775,51.725 30.775,50.675 ; C1_U_SCH14.2@30.775,49.75 30.775,50.6 30.775,50.675 ; R2_U_SCH14.2@37.825,49.75 37.825,50.675 37.5,51 31.1,51 30.775,50.675
INPUT_T15: C1_U_SCH15.2 J3.c8 R2_U_SCH15.2 | length 65.5
  Bottom Layer w0.2: J3.c8@10.01,108.91 10.79,108.91 13.904,105.796 13.904,61.7 17.354,58.25 C1_U_SCH15.2@19.575,58.25 ; C1_U_SCH15.2@19.725,58.25 19.725,59.175 20.05,59.5 26.45,59.5 26.775,59.175 R2_U_SCH15.2@26.775,58.25
INPUT_T16: C1_U_SCH16.2 J3.a8 R2_U_SCH16.2 | length 82.3
  Bottom Layer w0.2: J3.a8@4.93,108.91 6.12,110.1 11,110.1 14.304,106.796 14.304,64.8 16.604,62.5 29.4,62.5 30.775,61.125 30.775,59.175 ; C1_U_SCH16.2@30.775,58.25 30.775,59.1 30.775,59.175 ; R2_U_SCH16.2@37.825,58.25 37.825,59.175 37.5,59.5 31.1,59.5 30.775,59.175
INPUT_T17: C1_U_SCH17.2 J3.c9 R2_U_SCH17.2 | length 60.2
  Bottom Layer w0.2: J3.c9@10.01,111.45 10.95,111.45 14.704,107.696 14.704,68.7 16.654,66.75 C1_U_SCH17.2@19.725,66.75 19.725,67.675 20.05,68 26.45,68 26.775,67.675 R2_U_SCH17.2@26.775,66.75
INPUT_T18: C1_U_SCH18.2 J3.a9 R2_U_SCH18.2 | length 75.8
  Bottom Layer w0.2: J3.a9@4.93,111.45 6.08,112.6 11.2,112.6 15.104,108.696 15.104,73 17.104,71 28.9,71 30.8,69.1 30.8,67.7 ; C1_U_SCH18.2@30.775,66.75 30.775,67.675 30.8,67.7 ; R2_U_SCH18.2@37.825,66.75 37.825,67.675 37.5,68 31.1,68 30.8,67.7
INPUT_T19: C1_U_SCH19.2 J3.c10 R2_U_SCH19.2 | length 54.2
  Bottom Layer w0.2: J3.c10@10.01,113.99 11.01,113.99 15.504,109.496 15.504,76.396 16.65,75.25 C1_U_SCH19.2@19.575,75.25 ; C1_U_SCH19.2@19.725,75.25 19.725,76.175 20.05,76.5 26.45,76.5 26.775,76.175 R2_U_SCH19.2@26.775,75.25
INPUT_T20: C1_U_SCH20.2 J3.a10 R2_U_SCH20.2 | length 69.9
  Bottom Layer w0.2: J3.a10@4.93,113.99 6.14,115.2 11.4,115.2 15.904,110.696 15.904,81.5 17.904,79.5 29.4,79.5 30.8,78.1 30.8,76.2 ; C1_U_SCH20.2@30.775,75.25 30.775,76.175 30.8,76.2 ; R2_U_SCH20.2@37.825,75.25 37.825,76.175 37.5,76.5 31.1,76.5 30.8,76.2
INPUT_T21: C1_U_SCH21.2 J3.c11 R2_U_SCH21.2 | length 47.8
  Bottom Layer w0.2: J3.c11@10.01,116.53 11.504,116.53 16.304,111.73 16.304,85.496 18.05,83.75 C1_U_SCH21.2@19.725,83.75 19.725,84.675 20.05,85 26.45,85 26.775,84.675 R2_U_SCH21.2@26.775,83.75
INPUT_T22: C1_U_SCH22.2 J3.a11 R2_U_SCH22.2 | length 62.6
  Bottom Layer w0.2: J3.a11@4.93,116.53 6,117.6 11,117.6 16.704,111.896 16.704,89.6 18.204,88.1 28.2,88.1 30.8,85.5 30.8,84.7 ; C1_U_SCH22.2@30.775,83.75 30.775,84.675 30.8,84.7 ; R2_U_SCH22.2@37.825,83.75 37.825,84.675 37.5,85 31.1,85 30.8,84.7
INPUT_T23: C1_U_SCH23.2 J3.c12 R2_U_SCH23.2 | length 41.3
  Bottom Layer w0.2: J3.c12@10.01,119.07 11.03,119.07 17.104,112.996 17.104,93.696 18.5,92.3 19.675,92.3 C1_U_SCH23.2@19.725,92.25 19.725,93.175 20.05,93.5 26.45,93.5 26.775,93.175 R2_U_SCH23.2@26.775,92.25
INPUT_T24: C1_U_SCH24.2 J3.a12 R2_U_SCH24.2 | length 56.7
  Bottom Layer w0.2: J3.a12@4.93,119.07 6.16,120.3 11.2,120.3 17.504,113.996 17.504,98 18.904,96.6 28.3,96.6 30.8,94.1 30.8,93.2 ; C1_U_SCH24.2@30.775,92.25 30.775,93.175 30.8,93.2 ; R2_U_SCH24.2@37.825,92.25 37.825,93.175 37.5,93.5 31.1,93.5 30.8,93.2
INPUT_T25: C1_U_SCH25.2 J3.c13 R2_U_SCH25.2 | length 34.9
  Bottom Layer w0.2: J3.c13@10.01,121.61 11.59,121.61 17.904,115.296 17.904,102.421 C1_U_SCH25.2@19.575,100.75 ; C1_U_SCH25.2@19.725,100.75 19.725,101.675 20.05,102 26.45,102 26.775,101.675 R2_U_SCH25.2@26.775,100.75
INPUT_T26: C1_U_SCH26.2 J3.a13 R2_U_SCH26.2 | length 50.9
  Bottom Layer w0.2: J3.a13@4.93,121.61 6.12,122.8 11.9,122.8 18.304,116.396 18.304,106.4 19.704,105 28.8,105 30.8,103 30.8,101.7 ; C1_U_SCH26.2@30.775,100.75 30.775,101.675 30.8,101.7 ; R2_U_SCH26.2@37.825,100.75 37.825,101.675 37.5,102 31.1,102 30.8,101.7
INPUT_T27: C1_U_SCH27.2 J3.c14 R2_U_SCH27.2 | length 27.9
  Bottom Layer w0.2: J3.c14@10.01,124.15 11.15,124.15 18.704,116.596 18.704,111.121 19.725,110.1 ; C1_U_SCH27.2@19.725,109.25 19.725,110.1 ; R2_U_SCH27.2@26.775,109.25 26.775,110.175 26.45,110.5 20.05,110.5 19.725,110.175 19.725,110.1
INPUT_T28: C1_U_SCH28.2 J3.a14 R2_U_SCH28.2 | length 43.7
  Bottom Layer w0.2: J3.a14@4.93,124.15 6.08,125.3 10.566,125.3 19.104,116.762 19.104,114.7 20.504,113.3 29,113.3 30.8,111.5 30.8,110.2 ; C1_U_SCH28.2@30.775,109.25 30.775,110.175 30.8,110.2 ; R2_U_SCH28.2@37.825,109.25 37.825,110.175 37.5,110.5 31.1,110.5 30.8,110.2
INPUT_T29: C1_U_SCH29.2 J3.c15 R2_U_SCH29.2 | length 22.3
  Bottom Layer w0.2: J3.c15@10.01,126.69 10.51,126.69 C1_U_SCH29.2@19.45,117.75 ; C1_U_SCH29.2@19.725,117.75 19.725,118.675 20.05,119 26.45,119 26.775,118.675 R2_U_SCH29.2@26.775,117.75
INPUT_T30: C1_U_SCH30.2 J3.a15 R2_U_SCH30.2 | length 39.7
  Bottom Layer w0.2: J3.a15@4.81,126.81 5.05,126.81 6.04,127.8 11.1,127.8 16.9,122 28.1,122 30.8,119.3 30.8,118.7 ; C1_U_SCH30.2@30.775,117.75 30.775,118.675 30.8,118.7 ; R2_U_SCH30.2@37.825,117.75 37.825,118.675 37.5,119 31.1,119 30.8,118.7
INPUT_T31: C1_U_SCH31.2 J3.c16 R2_U_SCH31.2 | length 20.1
  Bottom Layer w0.2: J3.c16@10.01,129.23 10.97,129.23 13.95,126.25 C1_U_SCH31.2@19.725,126.25 19.725,127.175 20.05,127.5 26.45,127.5 26.775,127.175 R2_U_SCH31.2@26.775,126.25
INPUT_T32: C1_U_SCH32.2 J3.a16 R2_U_SCH32.2 | length 37.4
  Bottom Layer w0.2: J3.a16@4.93,129.23 6,130.3 28.7,130.3 30.775,128.225 30.775,127.175 ; C1_U_SCH32.2@30.775,126.25 30.775,127.1 30.775,127.175 ; R2_U_SCH32.2@37.825,126.25 37.825,127.175 37.5,127.5 31.1,127.5 30.775,127.175
INPUT_T33: C1_U_SCH33.2 J3.c17 R2_U_SCH33.2 | length 20.1
  Bottom Layer w0.2: J3.c17@10.01,131.77 15.37,131.77 18.35,134.75 C1_U_SCH33.2@19.725,134.75 19.725,135.675 20.05,136 26.45,136 26.775,135.675 R2_U_SCH33.2@26.775,134.75
INPUT_T34: C1_U_SCH34.2 J3.a17 R2_U_SCH34.2 | length 38.2
  Bottom Layer w0.2: J3.a17@4.93,131.77 6,130.7 29.225,130.7 30.7,132.175 C1_U_SCH34.2@30.7,134.4 ; C1_U_SCH34.2@30.775,134.75 30.775,135.675 31.1,136 37.5,136 37.825,135.675 R2_U_SCH34.2@37.825,134.75
INPUT_T35: C1_U_SCH35.2 J3.c18 R2_U_SCH35.2 | length 25.2
  Bottom Layer w0.2: J3.c18@10.01,134.31 15.435,134.31 19.575,138.45 C1_U_SCH35.2@19.575,143.25 ; C1_U_SCH35.2@19.725,143.25 19.725,144.175 20.05,144.5 26.45,144.5 26.775,144.175 R2_U_SCH35.2@26.775,143.25
INPUT_T36: C1_U_SCH36.2 J3.a18 R2_U_SCH36.2 | length 41.1
  Bottom Layer w0.2: J3.a18@4.93,134.31 5.981,133.259 15.784,133.259 21.225,138.7 28.725,138.7 30.775,140.75 C1_U_SCH36.2@30.775,143.25 30.775,144.175 31.1,144.5 37.5,144.5 37.825,144.175 R2_U_SCH36.2@37.825,143.25
INPUT_T37: C1_U_SCH37.2 J3.c19 R2_U_SCH37.2 | length 30.9
  Bottom Layer w0.2: J3.c19@10.01,136.85 14.775,136.85 18.625,140.7 18.625,149.225 19.7,150.3 19.7,151.725 C1_U_SCH37.2@19.725,151.75 19.725,152.675 20.05,153 26.45,153 26.775,152.675 R2_U_SCH37.2@26.775,151.75
INPUT_T38: C1_U_SCH38.2 J3.a19 R2_U_SCH38.2 | length 47.5
  Bottom Layer w0.2: J3.a19@4.93,136.85 6.28,135.5 15.125,135.5 19.025,139.4 19.025,146.1 20.425,147.5 28.775,147.5 30.775,149.5 C1_U_SCH38.2@30.775,151.75 30.775,152.675 31.1,153 37.5,153 37.825,152.675 R2_U_SCH38.2@37.825,151.75
INPUT_T39: C1_U_SCH39.2 J3.c20 R2_U_SCH39.2 | length 37.2
  Bottom Layer w0.2: J3.c20@10.01,139.39 14.115,139.39 17.825,143.1 17.825,159.55 18.525,160.25 C1_U_SCH39.2@19.725,160.25 19.725,161.175 20.05,161.5 26.45,161.5 26.775,161.175 R2_U_SCH39.2@26.775,160.25
INPUT_T40: C1_U_SCH40.2 J3.a20 R2_U_SCH40.2 | length 53.8
  Bottom Layer w0.2: J3.a20@4.93,139.39 6.32,138 14.325,138 18.225,141.9 18.225,154.7 19.425,155.9 28.925,155.9 30.775,157.75 C1_U_SCH40.2@30.775,160.25 30.775,161.175 31.1,161.5 37.5,161.5 37.825,161.175 R2_U_SCH40.2@37.825,160.25
INPUT_T41: C1_U_SCH41.2 J3.c21 R2_U_SCH41.2 | length 42.5
  Bottom Layer w0.2: J3.c21@10.01,141.93 13.355,141.93 17.025,145.6 17.025,167 18.775,168.75 C1_U_SCH41.2@19.725,168.75 19.725,169.675 20.05,170 26.45,170 26.775,169.675 R2_U_SCH41.2@26.775,168.75
INPUT_T42: C1_U_SCH42.2 J3.a21 R2_U_SCH42.2 | length 59.6
  Bottom Layer w0.2: J3.a21@4.93,141.93 6.26,140.6 13.625,140.6 17.425,144.4 17.425,162.8 18.925,164.3 29.075,164.3 30.775,166 C1_U_SCH42.2@30.775,168.75 30.775,169.675 31.1,170 37.5,170 37.825,169.675 R2_U_SCH42.2@37.825,168.75
INPUT_T43: C1_U_SCH43.2 J3.c22 R2_U_SCH43.2 | length 48
  Bottom Layer w0.2: J3.c22@10.01,144.47 12.595,144.47 16.225,148.1 16.225,174.8 18.675,177.25 C1_U_SCH43.2@19.575,177.25 ; C1_U_SCH43.2@19.725,177.25 19.725,178.175 20.05,178.5 26.45,178.5 26.775,178.175 R2_U_SCH43.2@26.775,177.25
INPUT_T44: C1_U_SCH44.2 J3.a22 R2_U_SCH44.2 | length 65.5
  Bottom Layer w0.2: J3.a22@4.93,144.47 6.3,143.1 12.925,143.1 16.625,146.8 16.625,171.5 18.025,172.9 28.675,172.9 30.775,175 C1_U_SCH44.2@30.775,177.25 30.775,178.175 31.1,178.5 37.5,178.5 37.825,178.175 R2_U_SCH44.2@37.825,177.25
INPUT_T45: C1_U_SCH45.2 J3.c23 R2_U_SCH45.2 | length 54
  Bottom Layer w0.2: J3.c23@10.01,147.01 12.035,147.01 15.425,150.4 15.425,182.9 18.275,185.75 C1_U_SCH45.2@19.725,185.75 19.725,186.675 20.05,187 26.45,187 26.775,186.675 R2_U_SCH45.2@26.775,185.75
INPUT_T46: C1_U_SCH46.2 J3.a23 R2_U_SCH46.2 | length 70.3
  Bottom Layer w0.2: J3.a23@4.93,147.01 6.031,145.909 12.534,145.909 15.825,149.2 15.825,178.3 18.925,181.4 28.675,181.4 30.775,183.5 C1_U_SCH46.2@30.775,185.75 30.775,186.675 31.1,187 37.5,187 37.825,186.675 R2_U_SCH46.2@37.825,185.75
INPUT_T47: C1_U_SCH47.2 J3.c24 R2_U_SCH47.2 | length 59.9
  Bottom Layer w0.2: J3.c24@10.01,149.55 11.775,149.55 14.625,152.4 14.625,190.8 18.075,194.25 C1_U_SCH47.2@19.725,194.25 19.725,195.175 20.05,195.5 26.45,195.5 26.775,195.175 R2_U_SCH47.2@26.775,194.25
INPUT_T48: C1_U_SCH48.2 J3.a24 R2_U_SCH48.2 | length 76.6
  Bottom Layer w0.2: J3.a24@4.93,149.55 6.28,148.2 11.825,148.2 15.025,151.4 15.025,186.8 18.125,189.9 28.675,189.9 30.625,191.85 C1_U_SCH48.2@30.625,194.25 ; C1_U_SCH48.2@30.775,194.25 30.775,195.175 31.1,195.5 37.5,195.5 37.825,195.175 R2_U_SCH48.2@37.825,194.25
INPUT_T49: C1_U_SCH49.2 J3.c25 R2_U_SCH49.2 | length 66.1
  Bottom Layer w0.2: J3.c25@10.01,152.09 11.715,152.09 13.825,154.2 13.825,199.3 17.275,202.75 C1_U_SCH49.2@19.575,202.75 ; C1_U_SCH49.2@19.725,202.75 19.725,203.675 20.05,204 26.45,204 26.775,203.675 R2_U_SCH49.2@26.775,202.75
INPUT_T50: C1_U_SCH50.2 J3.a25 R2_U_SCH50.2 | length 82.4
  Bottom Layer w0.2: J3.a25@4.93,152.09 6.22,150.8 11.725,150.8 14.225,153.3 14.225,194.2 18.325,198.3 28.825,198.3 30.625,200.1 C1_U_SCH50.2@30.625,202.75 ; C1_U_SCH50.2@30.775,202.75 30.775,203.675 31.1,204 37.5,204 37.825,203.675 R2_U_SCH50.2@37.825,202.75
INPUT_T51: C1_U_SCH51.2 J3.c26 R2_U_SCH51.2 | length 72.2
  Bottom Layer w0.2: J3.c26@10.01,154.63 11.655,154.63 13.025,156 13.025,207.2 17.075,211.25 C1_U_SCH51.2@19.575,211.25 ; C1_U_SCH51.2@19.725,211.25 19.725,212.175 20.05,212.5 26.45,212.5 26.775,212.175 R2_U_SCH51.2@26.775,211.25
INPUT_T52: C1_U_SCH52.2 J3.a26 R2_U_SCH52.2 | length 88.9
  Bottom Layer w0.2: J3.a26@4.93,154.63 6.16,153.4 11.725,153.4 13.425,155.1 13.425,202.8 17.625,207 29.025,207 30.775,208.75 C1_U_SCH52.2@30.775,211.25 30.775,212.175 31.1,212.5 37.5,212.5 37.825,212.175 R2_U_SCH52.2@37.825,211.25
INPUT_T53: C1_U_SCH53.2 J3.c27 R2_U_SCH53.2 | length 78.4
  Bottom Layer w0.2: J3.c27@10.01,157.17 11.195,157.17 12.225,158.2 12.225,215.5 16.475,219.75 C1_U_SCH53.2@19.725,219.75 19.725,220.675 20.05,221 26.45,221 26.775,220.675 R2_U_SCH53.2@26.775,219.75
INPUT_T54: C1_U_SCH54.2 J3.a27 R2_U_SCH54.2 | length 95.2
  Bottom Layer w0.2: J3.a27@4.93,157.17 6.1,156 11.525,156 12.625,157.1 12.625,211.4 16.725,215.5 29.025,215.5 30.775,217.25 C1_U_SCH54.2@30.775,219.75 30.775,220.675 31.1,221 37.5,221 37.825,220.675 R2_U_SCH54.2@37.825,219.75
INPUT_T55: C1_U_SCH55.2 J3.c28 R2_U_SCH55.2 | length 85.7
  Bottom Layer w0.2: J3.c28@10.01,159.71 11.212,159.71 11.425,159.923 11.425,215.395 11.425,225.506 14.169,228.25 C1_U_SCH55.2@19.725,228.25 19.725,229.175 20.05,229.5 26.45,229.5 26.775,229.175 R2_U_SCH55.2@26.775,228.25
INPUT_T56: C1_U_SCH56.2 J3.a28 R2_U_SCH56.2 | length 101.5
  Bottom Layer w0.2: J3.a28@4.93,159.71 6.14,158.5 11.275,158.5 11.825,159.05 11.825,219.9 15.925,224 29.025,224 30.775,225.75 C1_U_SCH56.2@30.775,228.25 30.775,229.175 31.1,229.5 37.5,229.5 37.825,229.175 R2_U_SCH56.2@37.825,228.25
INPUT_T57: C1_U_SCH57.2 J3.c31 R2_U_SCH57.2 | length 91.1
  Bottom Layer w0.2: J3.c31@9.977,167.297 8.575,168.7 4.225,168.7 2.9,170.025 2.9,180.375 10.225,187.7 10.225,226.003 19.725,235.503 C1_U_SCH57.2@19.725,236.75 19.725,237.675 20.05,238 26.45,238 26.775,237.675 R2_U_SCH57.2@26.775,236.75
INPUT_T58: C1_U_SCH58.2 J3.a32 R2_U_SCH58.2 | length 95
  Bottom Layer w0.2: J3.a32@4.93,169.87 3.3,171.5 3.3,180.175 10.625,187.5 10.625,225.837 17.538,232.75 29.275,232.75 30.775,234.25 C1_U_SCH58.2@30.775,236.75 30.775,237.675 31.1,238 37.5,238 37.825,237.675 R2_U_SCH58.2@37.825,236.75